# Altium PCB dds.PcbDoc
Units mm, origin at the board's own origin, x right, y up, seen from the top; angles counter-clockwise.
Board outline 152.4 x 101.6 mm, 2 copper layers (Top Layer, Bottom Layer); 43 components, 30 nets, 141 pads, 0 vias.
Unrouted connection lines stored in the file: 102.
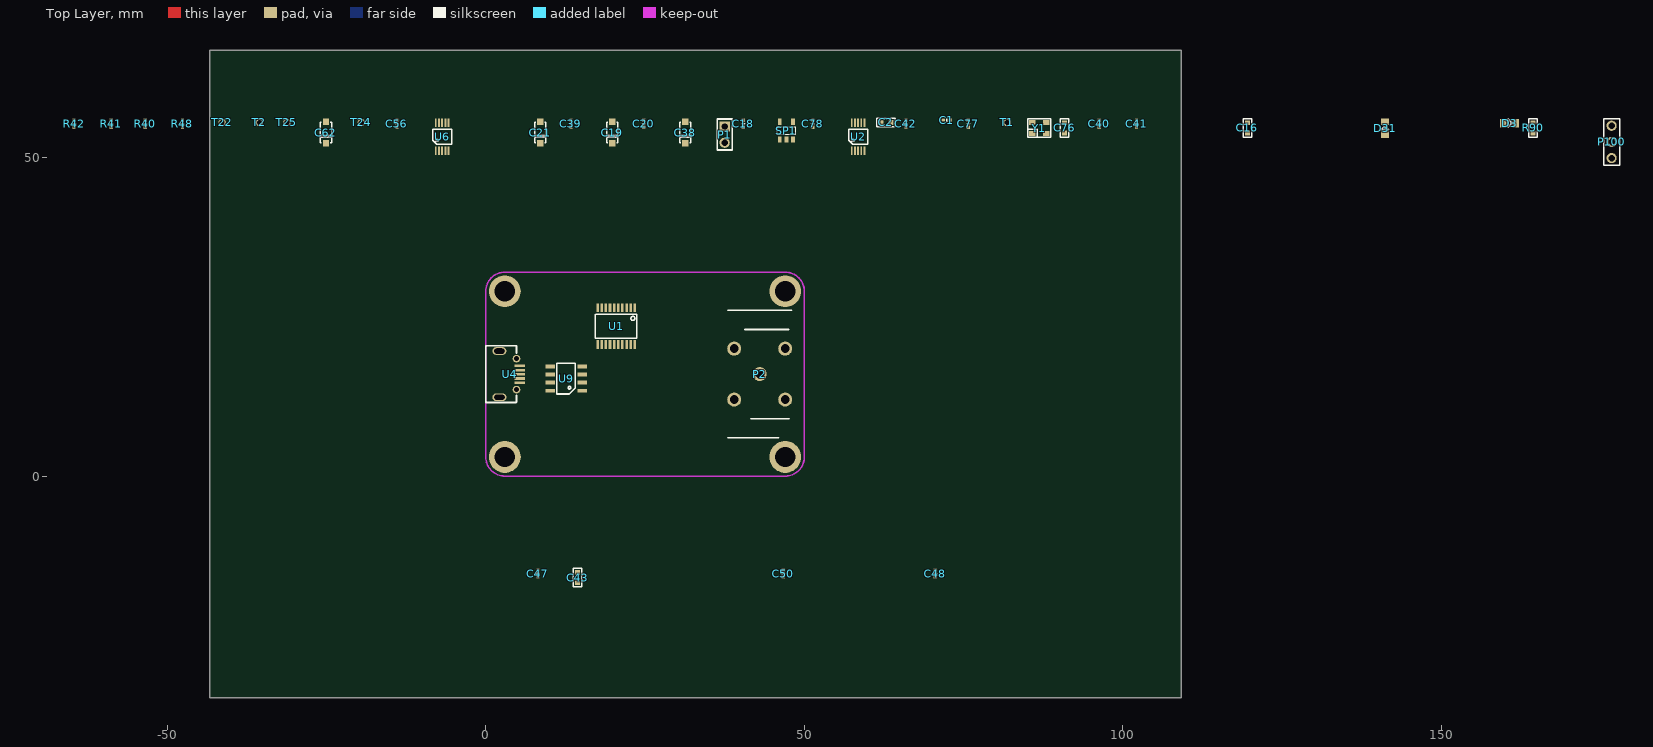
[diagram p0: Top Layer view]
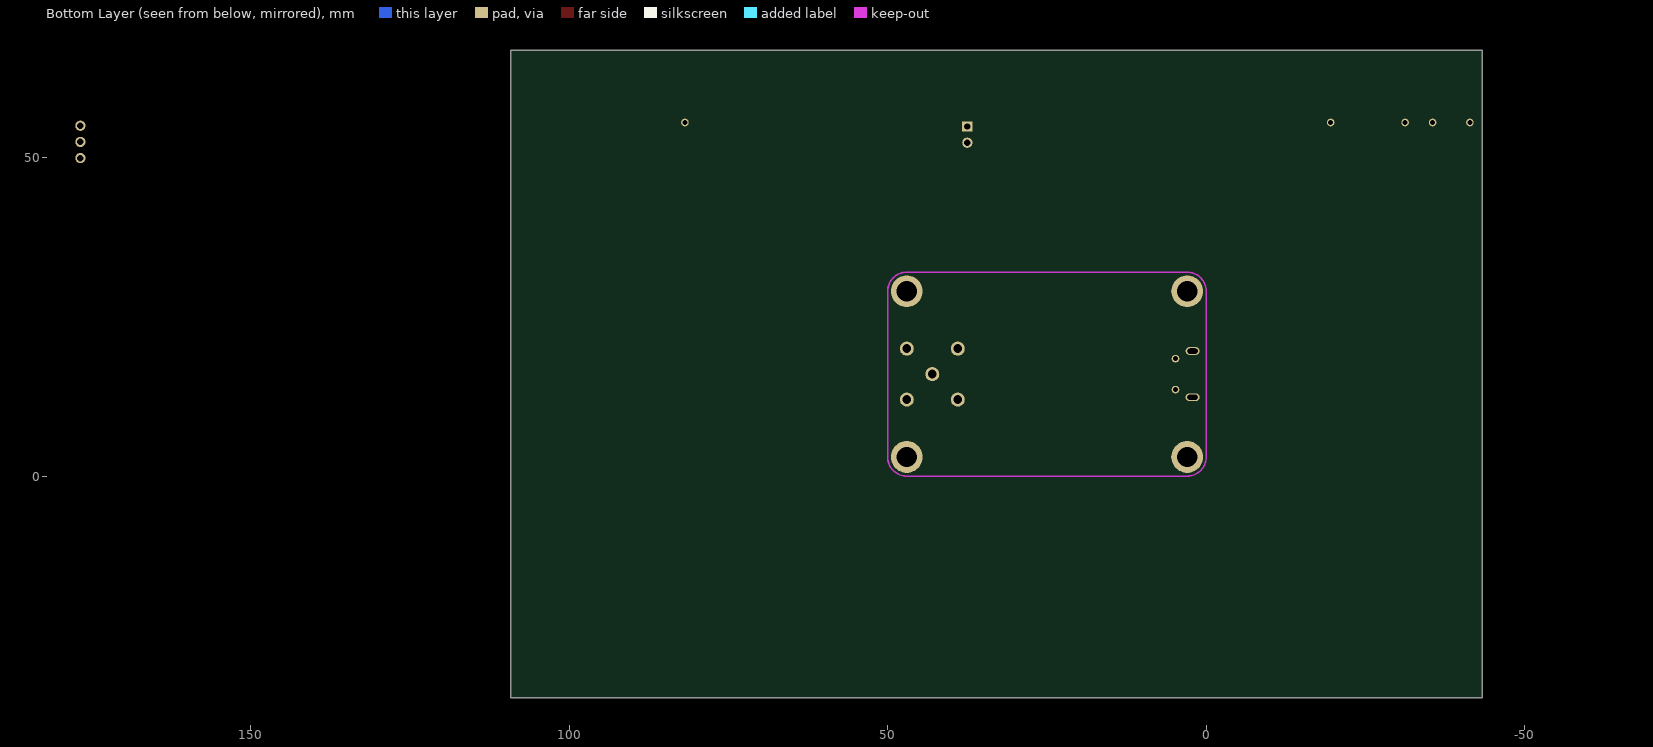
[diagram p1: Bottom Layer view, seen from below]

## Layer stack, top to bottom
Top Layer: signal copper 0.0356
Dielectric: dielectric 0.32, FR-4, Dk 4.8
Bottom Layer: signal copper 0.0356

## Board outline
-43.274,-34.8 109.126,-34.8 109.126,66.8 -43.274,66.8

## Design rules (kind name [scope] priority, off if disabled: settings)
Clearance [All] p1: gap=0.127
HoleSize [All] p1: absolutevalues=TRUE maxlimit=20 minlimit=0.025 maxpercent=80.000 minpercent=20.000
HoleToHoleClearance [All] p1: gap=0 allowstackedmicrovias=TRUE
MinimumSolderMaskSliver [All] p1: minsoldermaskwidth=0
PolygonConnect [All] p1: connectstyle=Relief reliefconductorwidth=0.254 reliefentries=4 polygonreliefangle="90 Angle" airgapwidth=0.254
RoutingVias [All] p1: holewidth=0.25 width=0.55 viastyle="Through Hole" minholewidth=0.25 minwidth=0.55 maxholewidth=10 maxwidth=10
SilkToSilkClearance [All] p1: silktosilkclearance=0
SilkToSolderMaskClearance [IsPad] p1: minsilkscreentomaskgap=0 clearancetoexposedcopper=TRUE
SolderMaskExpansion [All] p1: expansion=0.102
Width [All] p1: maxlimit=2.54 minlimit=0.127 preferedwidth=0.127 minimp=50.000000 maximp=50.000000 favimp=50.000000
23 further rules are at their usual default settings.

## Components (designator, comment, footprint, x,y, rotation, side; value= is the part's Value field where it differs from the comment)
C1 "C104" 0402 71.788,55.878 r0 top
C2 "10UF" 0603C 62.009,55.497 r0 top
C16 "C1uF" 0603C 119.54,53.846 r90 top
C18 "C104" 0402 40.419,54.735 r90 top
C19 "47UF" CAP-T-3216 19.083,52.322 r90 top
C20 "C104" 0402 24.798,54.735 r90 top
C21 "47UF" CAP-T-3216 7.78,52.322 r90 top
C38 "47uF" CAP-T-3216 30.513,52.322 r90 top
C39 "C0.1uF" 0402 13.368,54.735 r90 top
C40 "C0.1uF" 0402 96.299,54.735 r90 top
C41 "C0.1uF" 0402 102.141,54.735 r90 top
C42 "C0.1uF" 0402 65.946,54.735 r90 top
C43 "22UF" 0603C 14.423,-16.729 r90 top
C47 "104" 0402 8.2,-15.84 r90 top
C48 "104" 0402 70.557,-15.84 r90 top
C50 "104" 0402 46.681,-15.84 r90 top
C56 "C0.1uF" 0402 -13.937,54.735 r90 top
C62 "47uF" CAP-T-3216 -25.875,52.322 r90 top
C76 "22UF" 0603C 90.838,53.846 r90 top
C77 "C104" 0402 75.725,54.735 r90 top
C78 "C103" 0402 51.341,54.735 r90 top
D3 "LED-G" LED 159.672,55.37 r0 top
D31 "LED-R" LED 141.13,53.592 r90 top
P1 "Head2" HEAD2 37.498,52.322 r0 top
P2 "BNC" BNC-OSC 43,16 r180 top
P100 "SWD" "head*3 - duplicate" 176.69,54.989 r0 top
R40 "R5K" 0402 -53.434,54.735 r90 top
R41 "R5K" 0402 -58.768,54.735 r90 top
R42 "R5K" 0402 -64.61,54.735 r90 top
R48 "R5K" 0402 -47.592,54.735 r90 top
R90 "R1K" 0603R 164.371,53.846 r90 top
SP1 "SP6201-3-0" SOT23-5 46.134,52.83 r0 top
T1 "TP" TEST_POINT 81.821,55.497 r0 top
T2 "TP" TEST_POINT -35.527,55.497 r0 top
T22 "TP" TEST_POINT -41.369,55.497 r90 top
T24 "TP" TEST_POINT -19.525,55.497 r90 top
T25 "TP" TEST_POINT -31.209,55.497 r90 top
U1 "STM32F030F3" TSSOP20 23.4,26.4 r180 top
U2 "AD9833BRMZ" MSOP10 57.437,51.052 r90 top
U4 "MINI USB" Micro_USB_t 4.825,18.425 r180 top
U6 "MCP4728-E/UN" MSOP10 -7.841,51.052 r90 top
U9 "HT42B534" SOP-8 15.125,13.4 r180 top
Y1 "XTAL-25Mhz" XTAL3225 85.377,53.465 r0 top

## Footprints (in the part's own frame and the unit in brackets; to place one, negate y for a bottom-side part, rotate by r counter-clockwise, add the part's x,y. Pads: shape width x height; smd on the part's side, far side on the other; paste and mask are expansions set on the pad)
0402 [mm]
  rect 0.5x0.5 smd: 1(0,0) 2(1.1,0)
  silkscreen extent 0.55,-0.23 0.55,0.23
0603C [mil]
  rect 30x30 smd: 1(0,0) 2(62.99,0)
  silkscreen extent -26,-26 89,26
0603R [mil]
  rect 30x30 smd: 1(0,0) 2(62.99,0)
  silkscreen extent -26,-26 89,26
BNC-OSC [mm]
  round 2.2 hole 1.4: 1(0,0)
  round 2.2 hole 1.4 unplated: 2(-4,4) 2(-4,-4) 2(4,4) 2(4,-4)
  silkscreen extent -5,-10 5,10
CAP-T-3216 [mm]
  rect 1x1 smd: 1(-0.1,-0.8) 2(3.3,-0.8)
  silkscreen extent 0,-1.68 3.2,0.08
HEAD2 [mm]
  rect 1.6x1.6 hole 1: 1(0,2.54)
  round 1.6 hole 1: 2(0,0)
  silkscreen extent -1.17,-1.15 1.17,3.72
"head*3 - duplicate" [mm]
  round 1.6 hole 1: 1(0,0) 2(0,-2.54) 3(0,-5.08)
  silkscreen extent -1.25,-6.22 1.25,1.12
LED [mil]
  rect 40x50 smd: 1(0,0) 2(78.74,0)
  silkscreen extent 29,-25 49,27
Micro_USB_t [mm]
  round 1.2 hole 0.8: 0(-0.005,4.85) 0(-0.005,0)
  oval 2.2x1.2 hole 0.8 slot 1.6 at 0 deg: 0(2.675,6.05) 0(2.675,-1.2)
  rect 1.6x0.4 smd: 1(-0.525,1.125) 2(-0.525,1.787) 3(-0.525,2.45) 4(-0.525,3.112) 5(-0.525,3.775)
  silkscreen extent 0,-2.02 4.8,6.88
MSOP10 [mm]
  rect 1.4x0.3 smd: 1(0,0) 2(0,-0.5) 3(0,-1) 4(0,-1.5) 5(0,-2) 6(4.4,-2) 7(4.4,-1.5) 8(4.4,-1) 9(4.4,-0.5) 10(4.4,0)
  silkscreen extent 1,-2.5 3.35,0.5
SOP-8 [mm]
  rect 1.5x0.6 smd: 1(0,0) 2(0,-1.27) 3(0,-2.54) 4(0,-3.81) 5(5,-3.81) 6(5,-2.54) 7(5,-1.27) 8(5,0)
  silkscreen extent 1.05,-4.32 3.98,0.51
SOT23-5 [mm]
  rect 0.6x1 smd: 1(0,0) 2(1.05,0) 3(2.1,0) 4(2.1,2.8) 5(0,2.8)
  silkscreen extent -0.4,0.82 2.5,2.02
TEST_POINT [mm]
  round 1.2 hole 0.8: 1(0,0)
TSSOP20 [mm]
  rect 0.4x1.35 smd: 1(0,0) 2(0.65,0) 3(1.3,0) 4(1.95,0) 5(2.6,0) 6(3.25,0) 7(3.9,0) 8(4.55,0) 9(5.2,0) 10(5.85,0) 11(5.85,5.75) 12(5.2,5.75) 13(4.55,5.75) 14(3.9,5.75) 15(3.25,5.75) 16(2.6,5.75) 17(1.95,5.75) 18(1.3,5.75) 19(0.65,5.75) 20(0,5.75)
  silkscreen extent -0.33,1 6.17,4.75
XTAL3225 [mm]
  rect 1x0.8 smd: 1(0.4,0.3) 2(2.6,0.3) 3(2.6,2) 4(0.4,2)
  silkscreen extent -0.3,-0.3 3.3,2.6

## Part data
C1 C18 C20 C77 C78: library part C0.1uF, "贴片电容"
C2 C19 C21 C38 C62 C76: library part C10uF, "贴片电容"
C16 C47 C48 C50: library part C0.1uF
C43: library part C100uF
D3 D31: library part LED
P2: "BNC Elbow Connector"
P100: library part head*3
R40 R41 R42 R48: library part R10K
SP1: library part SP6201
U1: library part STM32F030F4
U2: library part AD9833
Y1: library part XTAL-100Mhz

## Free pads (board coordinates)
  round 5 hole 3.2: 0(3,3) 0(3,29) 0(47,3) 0(47,29)

## Nets (pads, with @x,y where several pads share a name; then routed paths per layer and width w, separated by ;. In a path a pad name is that pad's centre, name@x,y a point inside that pad or via, vN(x,y) a via of type N, cw(c..) or ccw(c..) an arc to the next point about the centre after c; other vN are vias at no path point)
3V3: C18.1 C21.1 C40.1 C41.1 C42.2 C56.1 C62.1 C76.1 C77.1 C78.1 R90.1 SP1.5 U1.5 U1.16 U2.2 U6.1 Y1.1 Y1.4
+5: R40.1 R41.1 R42.1 R48.2
DAC-DRY: R42.2 U1.10 U6.5
DAC-LDA: R41.2 U1.9 U6.4
DAC-SCL: R48.1 U1.7 U6.2
DAC-SDA: R40.2 U1.8 U6.3
FSYNC: U1.12 U2.8
GND: C1.2 C2.2 C16.1 C18.2 C19.2 C20.2 C21.2 C38.2 C39.2 C40.2 C41.2 C42.1 C43.2 C47.2 C48.2 C50.2 C56.2 C62.2 C76.2 C77.2 P1.2 P2.2 P100.3 SP1.2 U1.1 U1.15 U2.4 U2.9 U4.0 U4.5 U6.10 U9.1 Y1.2
LOWPOWER: D31.2 U1.6
NetC1_1: C1.1 C2.1 U2.3
NetC16_2: C16.2 U1.4
NetC78_2: C78.2 U2.1
NetD3_1: D3.1 D31.1 R90.2
OSC-IN: T1.1 U2.5 Y1.3
OSC-OUT: U2.10
SPI_MOSI: U1.13 U2.6
SPI_SCK: U1.11 U2.7
STM8-LED: D3.2 U1.14
SWCK: P100.1 U1.20
SWIO: P100.2 U1.19
U-(D+): U4.3 U9.5
U-(D-): U4.2 U9.6
USB-RX: U1.18 U9.2
USB-TX: U1.17 U9.4
VDDIO: C48.1 C50.1 U9.3 U9.8
VIN: C19.1 C20.1 C38.1 C39.1 C43.1 C47.1 P1.1 SP1.1 SP1.3 U4.1 U9.7
VOUTA: T22.1 U6.6
VOUTB: T2.1 U6.7
VOUTC: T25.1 U6.8
VOUTD: T24.1 U6.9
pads on no net: P2.1 SP1.4 U1.2 U1.3 U4.4

## Keep-outs
Keep-Out Layer:
  lines w0.254: 0,3 ccw(c3,3) 3,0 47,0 ccw(c47,3) 50,3 50,29 ccw(c47,29) 47,32 3,32 ccw(c3,29) 0,29 0,3